# Altium PCB Pulser.PcbDoc
Units mm, origin at the board's own origin, x right, y up, seen from the top; angles counter-clockwise.
Board outline 47.37 x 17.78 mm, 2 copper layers (Top Layer, Bottom Layer); 25 components, 13 nets, 68 pads, 49 vias.
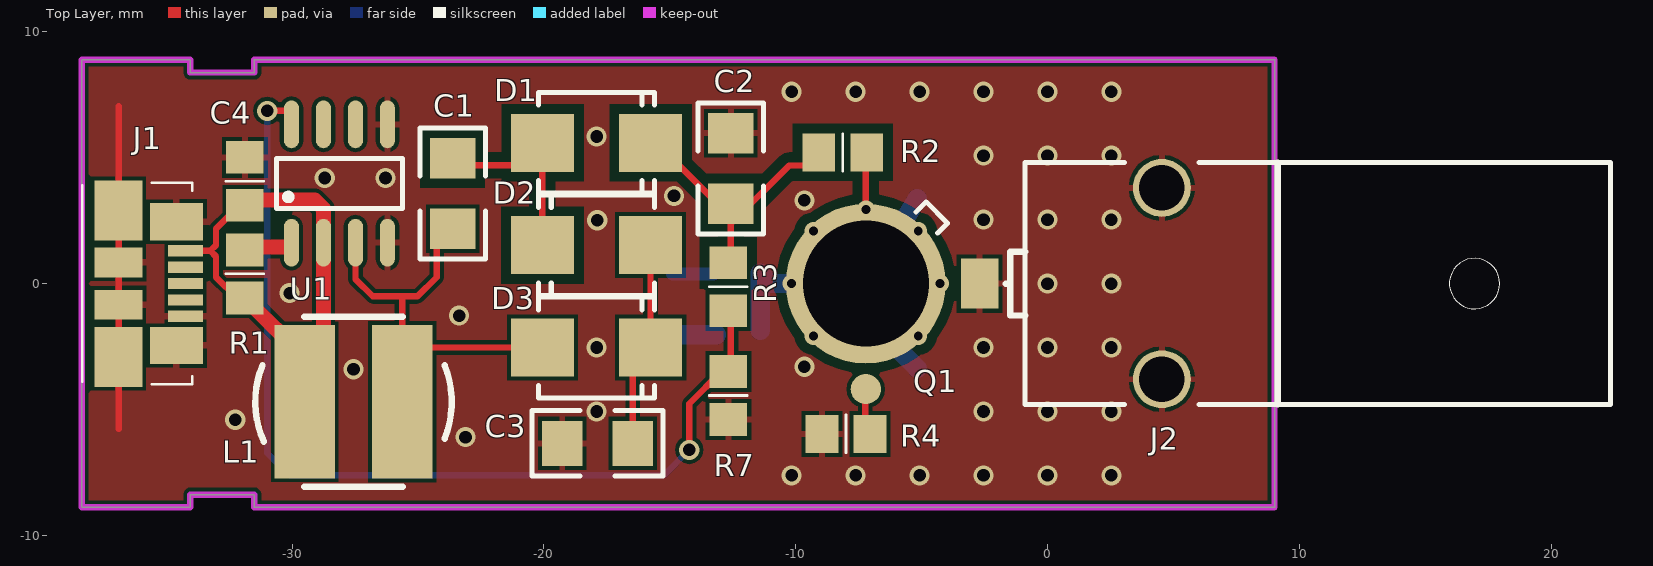
[diagram p0: Top Layer view]
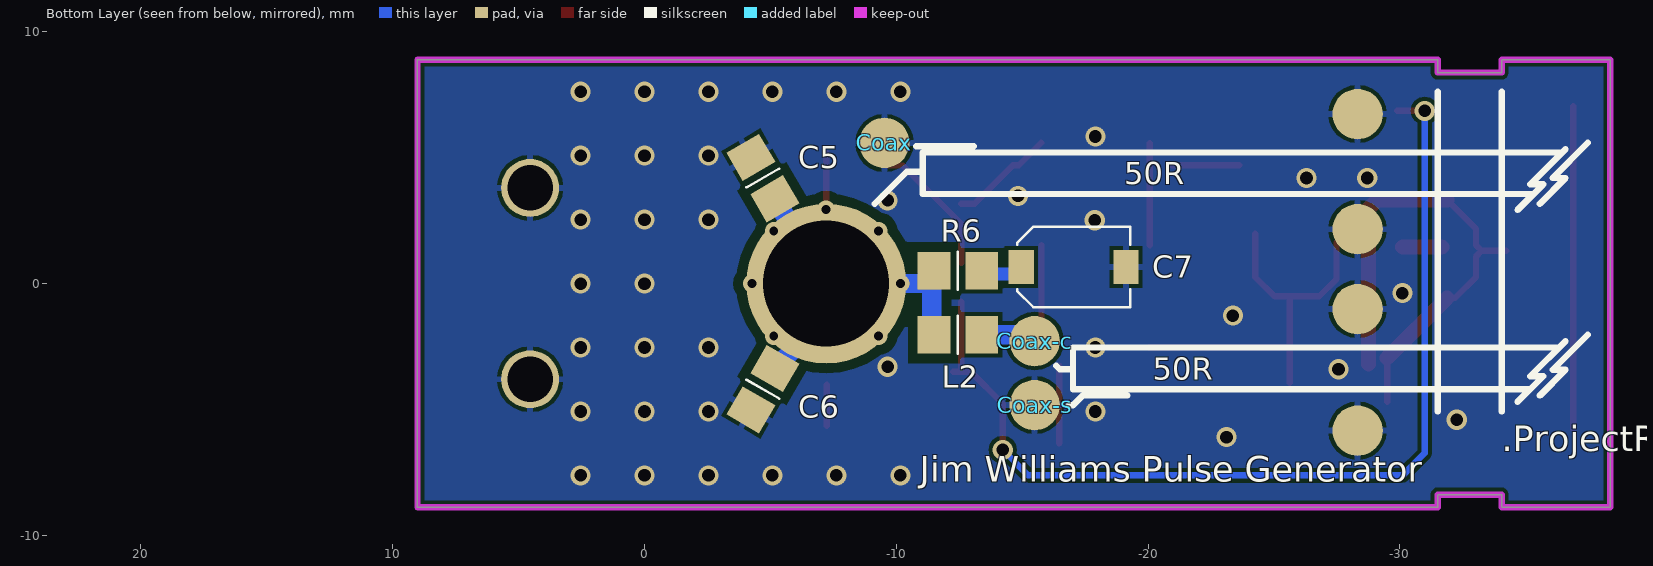
[diagram p1: Bottom Layer view, seen from below]
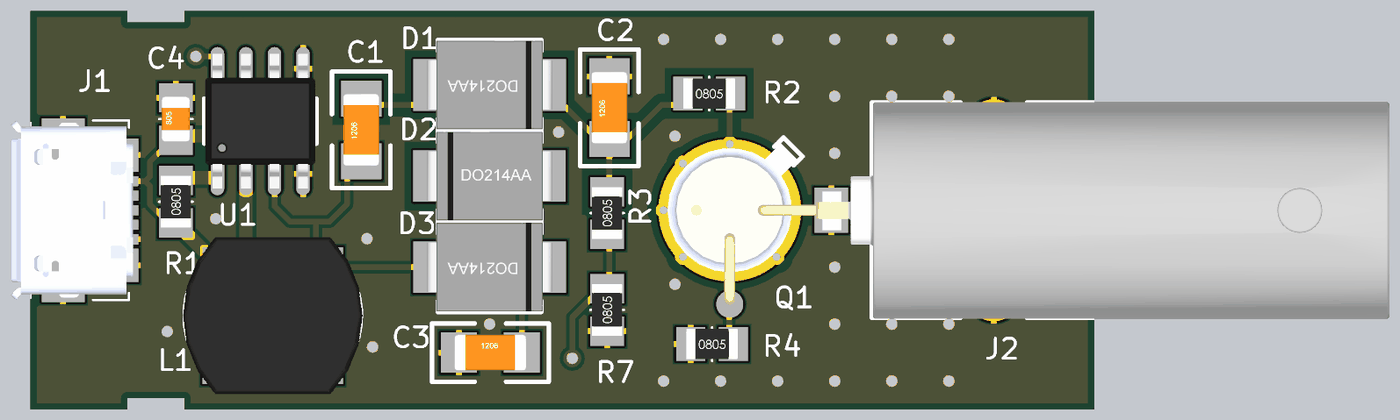
[diagram p2: 3D render of the assembled board from above, using the file's embedded part models]
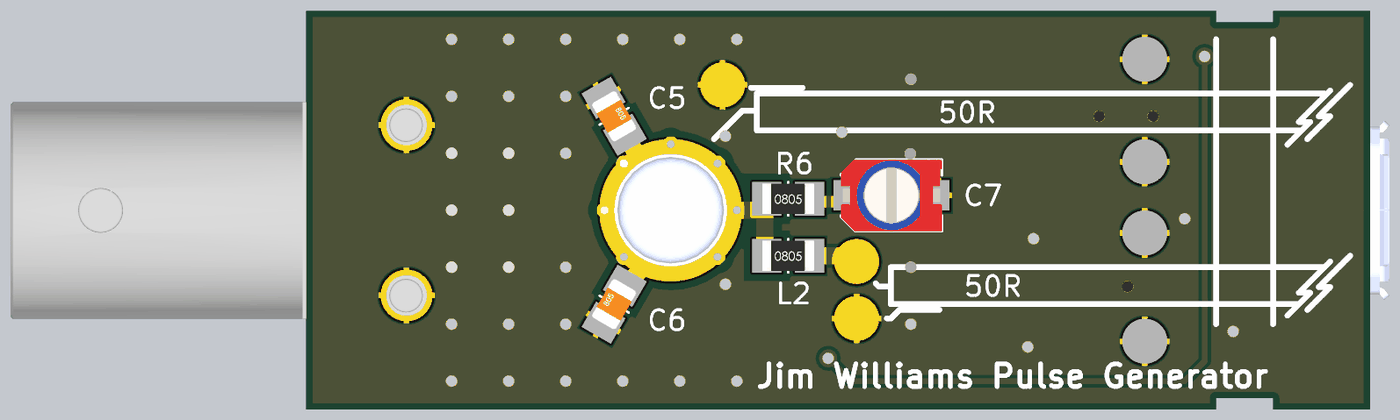
[diagram p3: 3D render of the assembled board from below, using the file's embedded part models]

## Layer stack, top to bottom
Top Solder: solder mask 0.0102, Solder Resist, Dk 3.5
Top Layer: signal copper 0.0356
Dielectric1: dielectric 0.32, FR-4, Dk 4.8
Bottom Layer: signal copper 0.0356
Bottom Solder: solder mask 0.0102, Solder Resist, Dk 3.5

## Board outline
-38.354,-8.89 -38.354,8.89 -34.036,8.89 -34.036,8.382 -31.496,8.382 -31.496,8.89 9.017,8.89 9.017,-8.89 -31.496,-8.89 -31.496,-8.382 -34.036,-8.382 -34.036,-8.89

## Design rules (kind name [scope] priority, off if disabled: settings)
Clearance Clearance_V++ [(InNet('V++') OR InNet('V+')    OR InNet('C'))] p1: gap=0.381
Clearance [All] p2: gap=0.152
HoleSize [All] p1: absolutevalues=TRUE maxlimit=10.16 minlimit=0.025 maxpercent=80.000 minpercent=20.000
MinimumSolderMaskSliver [All] p1: minsoldermaskwidth=0.102
PlaneConnect [All] p1: planeconnectstyle=Relief reliefexpansion=0.508 reliefentries=4 reliefconductorwidth=0.254 reliefairgap=0.152
PolygonConnect PolygonConnect_Via [isvia] p1: connectstyle=Direct reliefconductorwidth=0.254 reliefentries=4 polygonreliefangle="90 Angle" airgapwidth=0.254
PolygonConnect [All] p2: connectstyle=Relief reliefconductorwidth=0.254 reliefentries=4 polygonreliefangle="90 Angle" airgapwidth=0.152
RoomDefinition Pulser [InComponentClass('Pulser')] p1: confinementstyle=ConfineIn formatcopy=TRUE lockcomponents=FALSE outline -39.624,-10.287 23.495,-10.287 23.495,10.16 -39.624,10.16
RoutingVias [All] p1: holewidth=0.711 width=1.27 viastyle="Through Hole" minholewidth=0.711 minwidth=1.27 maxholewidth=0.711 maxwidth=1.27
SilkToSilkClearance [All] p1: silktosilkclearance=0.152
SilkToSolderMaskClearance SilkscreenOverComponentPads [IsPad] p1: minsilkscreentomaskgap=0.102 clearancetoexposedcopper=TRUE
SolderMaskExpansion [All] p1: expansion=0.102
Width [All] p1: maxlimit=0.762 minlimit=0.254 preferedwidth=0.254
25 further rules are at their usual default settings.

## Components (designator, comment, footprint, x,y, rotation, side; value= is the part's Value field where it differs from the comment)
C1 "470nF/100V" CCNP3216-1206 -23.622,3.581 r90 top
C2 "470nF/100V" CCNP3216-1206 -12.573,4.572 r90 top
C3 "470nF/100V" CCNP3216-1206 -17.872,-6.35 r0 top
C4 "10uF/10V" CCNP2012-0805 -31.877,4.064 r90 top
C5 "1.8pF/100V" CCNP2012-0805 -4.699,4.191 r240 bottom
C6 "1.8pF/100V" CCNP2012-0805 -4.699,-4.191 r120 bottom
C7 "1-27pF" CAP_TRIM_SMT_TZC3 -17.043,0.66 r180 bottom
Coax "PAD" Pad -9.525,5.588 r180 bottom
Coax-c "PAD" Pad -15.494,-2.286 r180 bottom
Coax-s "PAD" PAD -15.494,-4.826 r180 bottom
D1 "MURS120-13-F" SMB_Diode -17.907,5.588 r0 top
D2 "MURS120-13-F" SMB_Diode -17.907,1.524 r180 top
D3 "MURS120-13-F" SMB_Diode -17.907,-2.54 r0 top
J1 "USB_MICRO_B_CONNECTOR" "MOLEX - 47346-0001" -35.56,0 r0 top
J2 "BNC-MOLEX-0731000105_TERMINATED" "BNC_RA CON - MOLEX - RESISTOR" 9.144,0 r180 top
L1 "150uH" INDUCTOR_SMT -27.559,-4.699 r0 top
L2 "2T" CL2012-0805 -12.446,-2.032 r180 bottom
Q1 "2N2369" TO-18-FLUSH -7.214,0 r180 top
R1 "100R" CR2012-0805 -31.877,0.381 r90 top
R2 "1M" CR2012-0805 -8.128,5.207 r0 top
R3 "10M" CR2012-0805 -12.675,-0.127 r90 top
R4 "10K" CR2012-0805 -8.001,-5.969 r0 top
R6 "100R" CR2012-0805 -12.446,0.508 r180 bottom
R7 "24K" CR2012-0805 -12.675,-4.445 r90 top
U1 "LT1073CS8" SO-8_L -28.118,3.974 r90 top

## Footprints (in the part's own frame and the unit in brackets; to place one, negate y for a bottom-side part, rotate by r counter-clockwise, add the part's x,y. Pads: shape width x height; smd on the part's side, far side on the other; paste and mask are expansions set on the pad)
"BNC_RA CON - MOLEX - RESISTOR" [mm] "Connector; BNC Elbow; with terminating resistor"
  round 2.3 hole 1.8: 1(4.6,3.8) 1(4.6,-3.8)
  rect 1.5x2 smd: 2(11.836,0)
  silkscreen extent -13.21,-4.8 10.79,4.8, body extent -13.02,-4.82 12.53,4.83, height 9.31
CAP_TRIM_SMT_TZC3 [mm] "Murata Ceramic Trimmer Capacitors TZC3 Series"
  rect 1x1.35 smd: R(2.08,0) S(-2.08,0)
  silkscreen extent -2.25,-1.6 2.25,1.6, body extent -2.25,-1.6 2.25,1.6, height 1.1
CCNP2012-0805 [mm]
  rect 1.3x1.5 smd: 1(-0.95,0) 2(0.95,0)
  silkscreen extent 0,-0.75 0,0.75, body extent -1,-0.62 1,0.63, height 0.78
CCNP3216-1206 [mm]
  rect 1.6x1.8 smd: 1(-1.4,0) 2(1.4,0)
  silkscreen extent -2.6,-1.3 2.6,1.3, body extent -1.6,-0.8 1.6,0.8, height 1
CL2012-0805 [mm]
  rect 1.3x1.5 smd: 1(-0.95,0) 2(0.95,0)
  silkscreen extent 0,-0.75 0,0.75, body extent -1.15,-0.67 1.15,0.68, height 0.76
CR2012-0805 [mm]
  rect 1.3x1.5 smd: 1(-0.95,0) 2(0.95,0)
  silkscreen extent 0,-0.75 0,0.75, body extent -1.15,-0.67 1.15,0.68, height 0.76
INDUCTOR_SMT [mm]
  rect 2.4x6.096 smd: 1(-1.93,0) 2(1.93,0)
  silkscreen extent -3.9,-3.38 3.9,3.38, body extent -4,-3.5 4,3.5, height 5
"MOLEX - 47346-0001" [mm] "RECEPTACLE, MICRO USB B, BOTTOM MOUNT"
  rect 1.38x0.45 smd: D+(1.33,0) D-(1.33,0.65) G(1.33,-1.3) ID(1.33,-0.65) Vbus(1.33,1.3)
  rect 1.9x2.38 smd: S1(-1.33,2.91) S4(-1.33,-2.91)
  rect 1.9x1.18 smd: S2(-1.33,0.838) S3(-1.33,-0.838)
  rect 2.1x1.48 smd: S5(0.97,2.46) S6(0.97,-2.46)
  silkscreen extent -2.78,-4 1.6,4, body extent -3.65,-3.99 1.78,3.99, height 2.67
Pad [mm] "Pad"
  round 2 smd paste-2: 1(0,0)
PAD [mm] "Pad"
  round 2 smd paste-2: 1(0,0)
SMB_Diode [mm] "Diode"
  rect 2.5x2.3 smd: A(-2.14,0) K(2.15,0)
  silkscreen extent -2.3,-2 2.3,2, body extent -2.79,-1.97 2.79,1.97, height 2.6
SO-8_L [mm] "8-Pin Small Outline Integrated Circuit 1.27 mm Pitch, IPC High Density"
  oval 1.9x0.6 smd: 1(-2.35,1.905) 2(-2.35,0.635) 3(-2.35,-0.635) 4(-2.35,-1.905) 5(2.35,-1.905) 6(2.35,-0.635) 7(2.35,0.635) 8(2.35,1.905)
  silkscreen extent -1,-2.5 1,2.5, body extent -3,-2.45 3,2.45, height 1.7
TO-18-FLUSH [mm] "Metal can transistor mounted flush"
  round 1.2 smd: B(0,4.191)
  round 6.35 hole 5: C(0,0)
  round 0 smd mask+0: E(-4,0)
  Top Layer lines w0.254: 2.946,0 0,0 ; 2.083,2.083 0,0 ; 2.083,-2.083 0,0 ; 0,-2.946 0,0 ; -2.083,2.083 0,0 ; -2.083,-2.083 0,0 ; -2.946,0 0,0
  silkscreen extent -3.24,-3.24 -1.99,-2, body extent -4.79,-4.59 4.11,4.31, height 3.62

## Part data
C1 C2 C3 C5 C6: library part Cap, "Capacitor"
C4: library part Cap_CCNP_0805, "Capacitor SMT 0805"
C7: library part Cap_Trimmer_TZC3, "Trimmer Capacitor muRata TZC3 series"
D1 D2 D3: "Fast / Ultrafast Diode, 200 V, 1 A"
J1: "USB Micro-B Connector"
J2: "BNC Connector"
L1: library part INDUCTOR-SMT, "Inductor - SMT 3mm"
L2: library part Ind_CL0805, "Resistor"
Q1: "High Speed Switching Transistor"
R1 R2 R3 R4 R6 R7: library part Res, "Resistor"
U1: "Micropower DC/DC Converter (Adjustable, 212mV reference)"

## Free pads (board coordinates)
  round 2 smd far side: 0(-28.321,6.731) 1(-28.321,2.159) 2(-28.321,-1.016) 3(-28.321,-5.842)

## Via types
v1: diameter 0.8, hole 0.5, Top Layer to Bottom Layer, tented both sides, 42 vias
v2: diameter 0.711, hole 0.356, Top Layer to Bottom Layer, tented both sides, 7 vias

## Nets (pads, with @x,y where several pads share a name; then routed paths per layer and width w, separated by ;. In a path a pad name is that pad's centre, name@x,y a point inside that pad or via, vN(x,y) a via of type N, cw(c..) or ccw(c..) an arc to the next point about the centre after c; other vN are vias at no path point)
B: Q1.B R4.2 | length 1.6
  Top Layer w0.254: R4.2@-7.239,-5.654 Q1.B@-7.239,-4.025
C: C5.2 C6.2 L2.1 Q1.C R2.2 R6.1 | length 17.6
  Top Layer w0.254: Q1.C R2.2@-7.214,5.207
  Bottom Layer w0.762: L2.1@-11.405,-1.869 -11.405,0.417 -10.988,0 v2(-10.161,0) ; Q1.C@-8.542,0 C6.2 ; Q1.C C5.2
  other v2: -9.298,-2.083 -5.131,-2.083 -4.268,0 -9.298,2.083 -5.131,2.083 -7.214,2.946
GND: C2.2 C3.1 C4.2 C5.1 C6.1 C7.R Coax-s.1 Coax.1 J1.G J1.S1 J1.S2 J1.S3 J1.S4 J1.S5 J1.S6 J2.1 J2.2 pad.0 pad.1 pad.2 pad.3 R4.1 R7.1 U1.4 U1.5 | length 12.8
  Top Layer w0.254: -36.89,-5.775 J1.S4 J1.S3 J1.S2 J1.S1 -36.89,7.045
  other v1: -10.16,-7.62 -7.62,-7.62 -5.08,-7.62 -2.54,-7.62 0,-7.62 2.54,-7.62 -23.114,-6.096 -32.258,-5.41 -17.907,-5.08 -2.54,-5.08 0,-5.08 2.54,-5.08 -27.559,-3.404 -9.652,-3.302 -17.907,-2.54 -2.54,-2.54 0,-2.54 2.54,-2.54 -23.368,-1.27 -30.099,-0.381 0,0 2.54,0 -17.882,2.515 -2.54,2.54 0,2.54 2.54,2.54 -9.652,3.302 -14.834,3.48 -28.702,4.191 -26.289,4.191 -2.54,5.08 0,5.08 2.54,5.08 -17.907,5.842 -10.16,7.62 -7.62,7.62 -5.08,7.62 -2.54,7.62 0,7.62 2.54,7.62
NetC3_2: C3.2 D2.A D3.K | length 7.1
  Top Layer w0.254: C3.2 D3.K@-16.472,-3.255 ; D3.K@-15.767,-2.53 D2.A
NetC7_S: C7.S R6.2 | length 1.6
  Bottom Layer w0.508: C7.S@-14.887,0.381 R6.2@-13.244,0.381
NetCoax-c_1: Coax-c.1 L2.2 | length 2.1
  Bottom Layer w0.762: Coax-c.1@-15.24,-2.032 L2.2@-13.142,-2.032
NetR1_2: R1.2 U1.1 | length 1.6
  Top Layer w0.6: R1.2@-31.66,1.446 U1.1@-30.099,1.446
PULSE: Q1.E
SENSE: R3.1 R7.2 U1.8 | length 39.3
  Top Layer w0.254: v1(-30.988,6.858) U1.8@-29.889,6.858 ; v1(-14.224,-6.604) -14.224,-4.775 -12.944,-3.495 R7.2@-12.573,-3.495 ; R3.1@-12.573,-0.726 R7.2@-12.573,-3.495 ; R7.2@-12.253,-3.495 R7.2@-12.573,-3.495
  Bottom Layer w0.254: v1(-30.988,6.858) -30.988,-6.731 -30.099,-7.62 -15.24,-7.62 v1(-14.224,-6.604)
SW1: C1.1 D3.A L1.2 U1.3 | length 16
  Top Layer w0.254: U1.3 -27.483,0.178 -26.797,-0.508 -25.629,-0.508 ; L1.2@-25.629,-3.937 L1.2@-25.629,-2.54 ; C1.1@-24.257,1.971 -24.257,0.254 -25.019,-0.508 -25.629,-0.508 ; D3.A L1.2@-25.629,-2.54 ; L1.2@-25.629,-2.54 -25.629,-0.508
V+: C1.2 D1.A D2.K | length 6.7
  Top Layer w0.254: C1.2@-23.622,4.702 D1.A@-20.939,4.702 ; D2.K D1.A@-20.057,5.578
V++: C2.1 D1.K R2.1 R3.2 | length 10.4
  Top Layer w0.254: D1.K -14.868,4.699 -14.63,4.699 -14.395,4.464 -13.106,3.175 C2.1@-12.573,3.175 ; R3.2@-12.573,0.823 -12.573,2.374 -10.257,4.689 -9.596,4.689 R2.1
VIN: C4.1 J1.Vbus L1.1 R1.1 U1.2 | length 20.4
  Top Layer w0.254: J1.Vbus -33.244,1.3 ; R1.1@-32.197,-0.569 -33.02,0.254 -33.02,1.076 -33.244,1.3 ; C4.1@-31.877,3.317 -33.02,2.174 -33.02,1.524 -33.244,1.3 ; L1.1 L1.1@-29.489,-2.957 ; -29.098,3.317 -29.083,3.317
  Top Layer w0.6: R1.1 L1.1@-29.489,-2.957 ; C4.1@-31.877,3.317 -29.098,3.317 -28.753,2.972 L1.1@-28.753,-3.201
pads on no net: J1.D+ J1.D- J1.ID U1.6 U1.7

## Polygon pours and split planes (outlines as drawn)
GND on Top Layer "Top Layer-No Net" (solid, remove dead copper, pour order 2): 9.271,8.89 9.271,-9.144 -38.608,-9.144 -38.608,8.89
GND on Bottom Layer "Top Layer-usb-shield" (solid, remove dead copper, pour order 3): -38.862,9.271 10.033,9.271 10.033,-9.144 -38.862,-9.144

## Keep-outs
Keep-Out Layer:
  the board outline again, w0.254

## Silkscreen, mask and mechanical layers (free items; w line width, h text height)
Bottom Overlay:
  lines w0.254: -37.465,-2.032 -36.068,-3.429 -36.576,-3.429 -35.56,-4.445 ; -37.465,5.588 -36.068,4.191 -36.576,4.191 -35.56,3.175 ; -36.576,-2.286 -35.179,-3.683 -35.687,-3.683 -34.671,-4.699 ; -36.576,5.334 -35.179,3.937 -35.687,3.937 -34.671,2.921 ; -36.322,-2.54 -17.018,-2.54 -17.018,-4.191 -35.179,-4.191 ; -36.322,5.207 -11.049,5.207 -11.049,3.556 -35.306,3.556 ; -34.036,-5.08 -34.036,7.62 ; -31.496,-5.08 -31.496,7.62 ; -19.177,-4.445 -17.399,-4.445 -17.018,-4.826 -16.84,-4.826 ; -17.018,-3.404 -16.485,-3.404 -16.345,-3.264 ; -13.081,5.461 -10.795,5.461 ; -11.049,4.445 -10.414,4.445 -9.144,3.175
  text "50R" at -19.05,3.937 h0.89
  text "50R" at -20.193,-3.81 h0.89
  text ".ProjectRevision" at -34.036,-6.655 h1.02
  text "Jim Williams Pulse Generator" at -10.922,-7.874 h1.02